# EAGLE board strobeeee (EAGLE 6.3), part 1 of 2
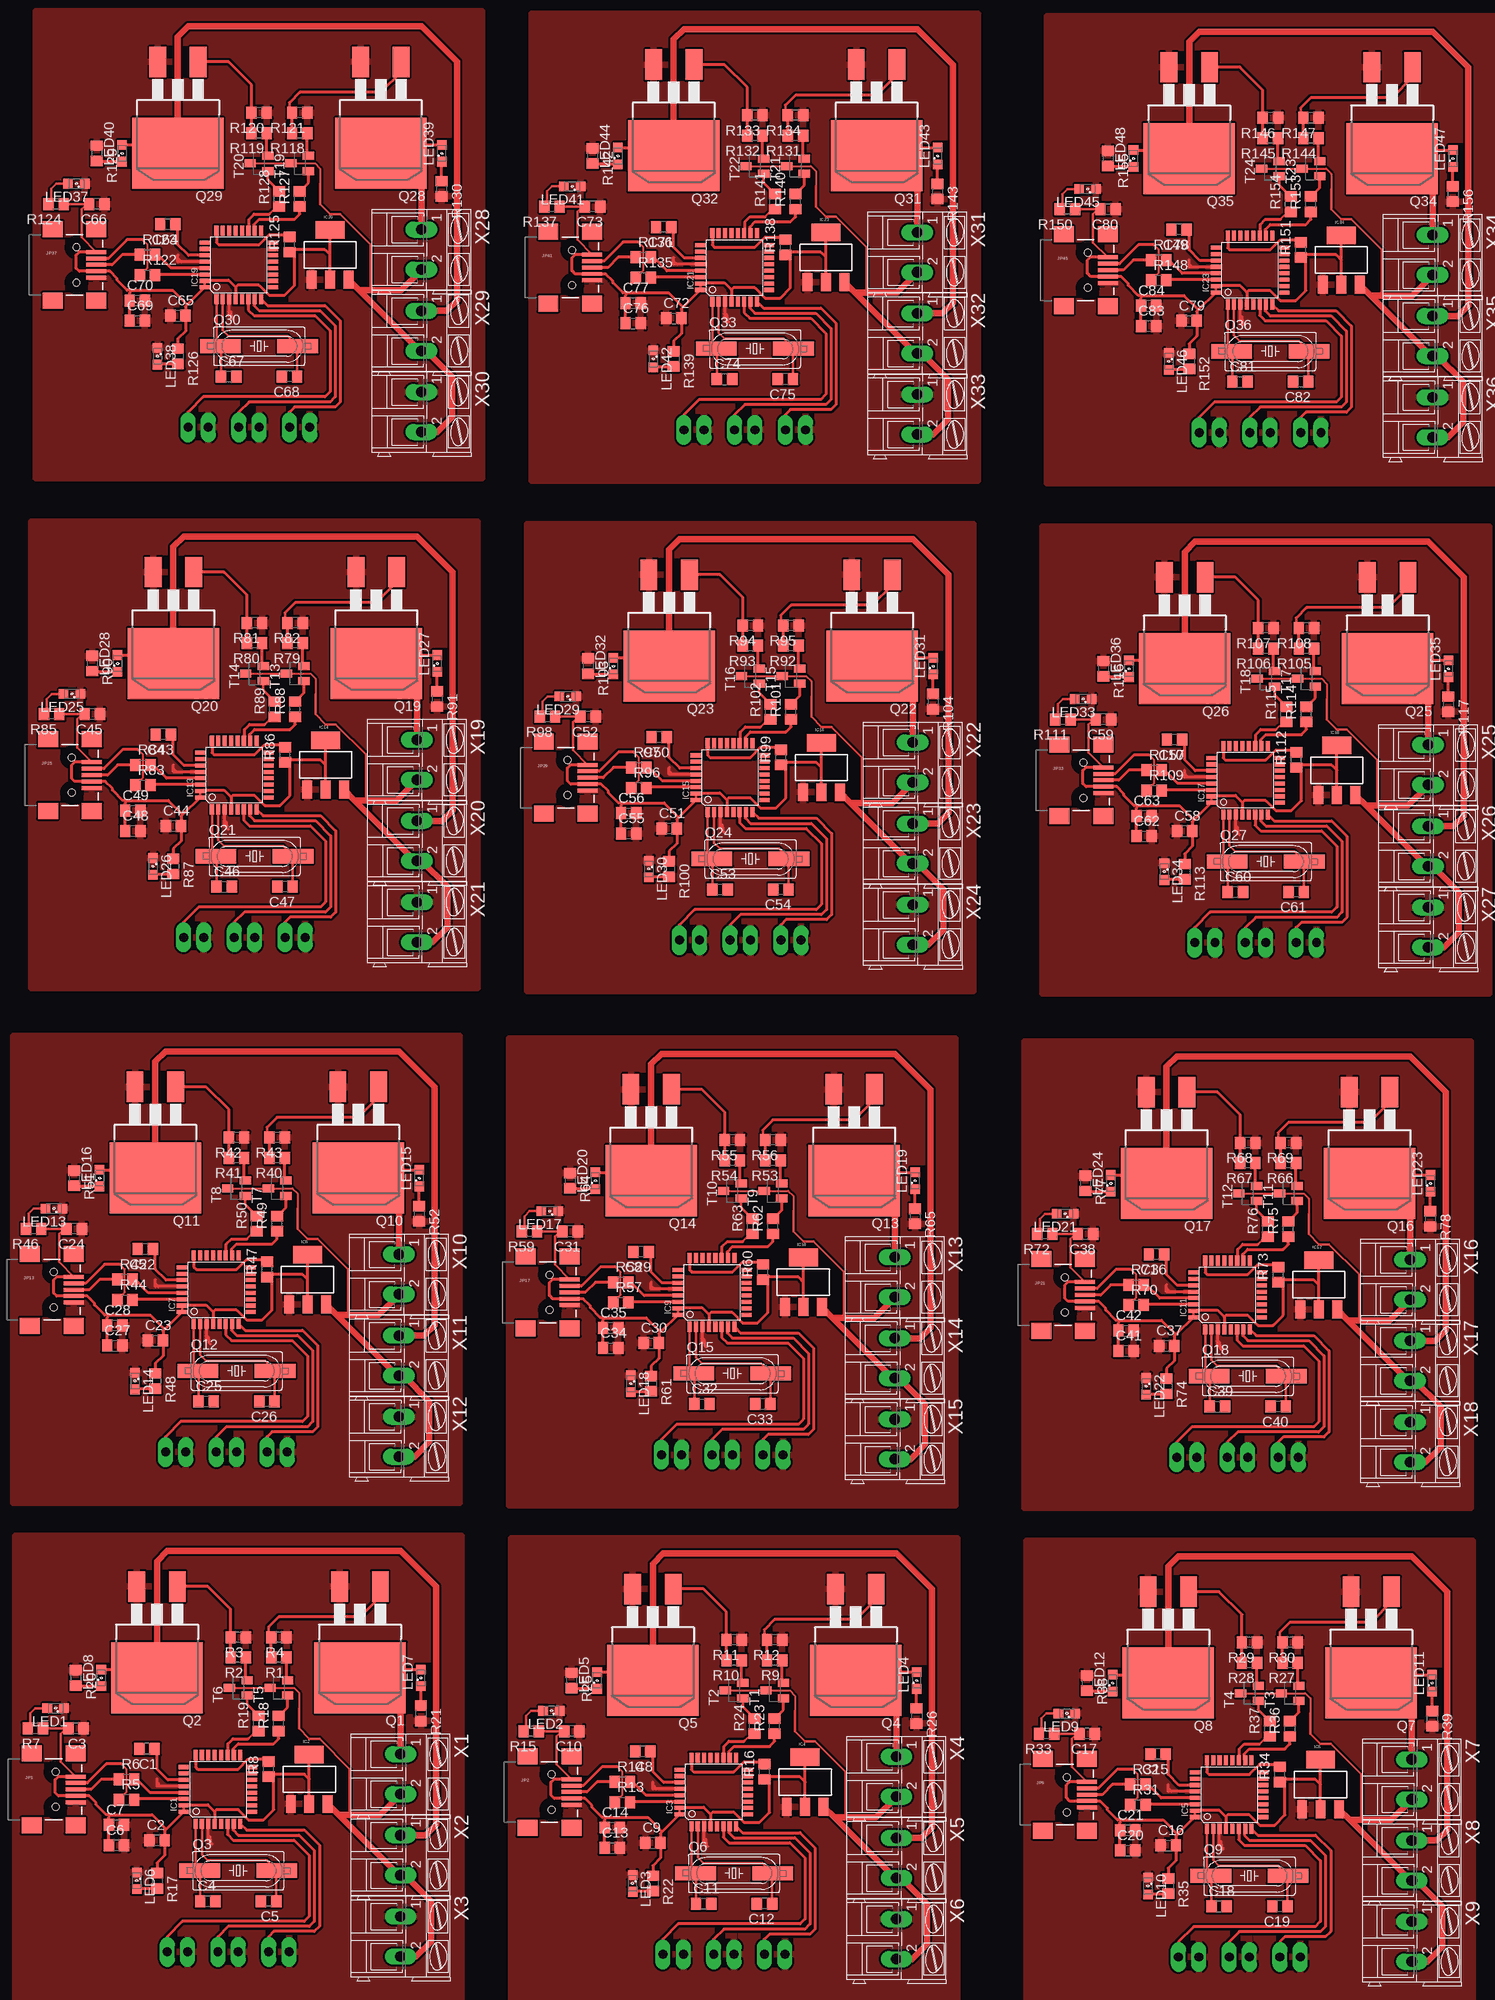
[diagram p0: board, top side]

No outline drawn. Coordinates in mm, seen from the top.
Copper layers (1*16): Top 0.035mm / dielectric 1.5mm / Bottom 0.035mm
Design rules "default": minimum track width 10mil, minimum drill 24mil, track to track 8mil, track to pad 8mil, pad to pad 8mil, via to via 8mil, smd to smd 8mil, copper to edge 40mil, drill to drill 8mil, minimum pad ring 10mil, minimum via ring 8mil, stop-mask expansion 4mil, vias tented up to drill 0mil, thermal gap 10mil

## Footprints (pad centres in the part's own frame; a part is rotated, then mirrored left to right if it is on the bottom)
C0805 = smd 1.3 x 1.5: 1 -0.95,0; 2 0.95,0
TQFP32-08 = smd 1.27 x 0.508: 1 -4.293,2.8; 2 -4.293,2; 3 -4.293,1.2; 4 -4.293,0.4; 5 -4.293,-0.4; 6 -4.293,-1.2; 7 -4.293,-2; 8 -4.293,-2.8; 17 4.293,-2.8; 18 4.293,-2; 19 4.293,-1.2; 20 4.293,-0.4; 21 4.293,0.4; 22 4.293,1.2; 23 4.293,2; 24 4.293,2.8 | smd 0.508 x 1.27: 9 -2.8,-4.293; 10 -2,-4.293; 11 -1.2,-4.293; 12 -0.4,-4.293; 13 0.4,-4.293; 14 1.2,-4.293; 15 2,-4.293; 16 2.8,-4.293; 25 2.8,4.293; 26 2,4.293; 27 1.2,4.293; 28 0.4,4.293; 29 -0.4,4.293; 30 -1.2,4.293; 31 -2,4.293; 32 -2.8,4.293
SOT223 = smd 1.219 x 2.235: 1 -2.311,-3.099; 2 0,-3.099; 3 2.311,-3.099 | smd 3.6 x 2.2: 4 0,3.099
USB-MINIB = smd 2.5 x 0.5: D+ 2.5,0; D- 2.5,0.8; GND 2.5,-1.6; ID 2.5,-0.8; VBUS 2.5,1.6 | smd 2.5 x 2: MTN1 -3,4.5; MTN2 2.5,4.5; MTN3 -3,-4.5; MTN4 2.5,-4.5 | hole 0.9: 0,2.2; 0,-2.2
1X02_LONGPADS = drill 1.118 pad 1.88 long: 1 0,0; 2 2.54,0
SML0805 = smd 1.2 x 1.2: A 1.05,0; C -1.05,0
D2PACK = smd 2.083 x 3.81: 1 -2.54,-8.89; 3 2.54,-8.89 | smd 11.43 x 8.89: 2 0,2.54
SM49 = smd 5.08 x 1.778: 1 -4.826,0; 2 4.826,0
R0805 = smd 1.3 x 1.5: 1 -0.95,0; 2 0.95,0
SOT23 = smd 1 x 1.4: 1 -0.95,-1.1; 2 0.95,-1.1; 3 0,1.1
AK300/2 = drill 1.321 long: 1 -2.515,0; 2 2.489,0

## Placement (x,y rotation side)
C1  1uF  [C0805]  17.78,60.96 180 top
C2  100N  [C0805]  19.05,49.53 0 top
C3  100N  [C0805]  8.89,63.5 180 top
C4  22Pf  [C0805]  25.4,41.91 0 top
C5  22Pf  [C0805]  33.02,41.91 180 top
C6  100N  [C0805]  13.97,48.9 0 top
C7  100N  [C0805]  13.97,51.44 0 top
C8  1uF  [C0805]  79.84,60.63 180 top
C9  100N  [C0805]  81.11,49.2 0 top
C10  100N  [C0805]  70.95,63.17 180 top
C11  22Pf  [C0805]  87.46,41.58 0 top
C12  22Pf  [C0805]  95.08,41.58 180 top
C13  100N  [C0805]  76.03,48.57 0 top
C14  100N  [C0805]  76.03,51.11 0 top
C15  1uF  [C0805]  144.35,60.31 180 top
C16  100N  [C0805]  145.62,48.88 0 top
C17  100N  [C0805]  135.46,62.85 180 top
C18  22Pf  [C0805]  151.97,41.26 0 top
C19  22Pf  [C0805]  159.59,41.26 180 top
C20  100N  [C0805]  140.54,48.24 0 top
C21  100N  [C0805]  140.54,50.78 0 top
C22  1uF  [C0805]  17.57,123.5 180 top
C23  100N  [C0805]  18.84,112.07 0 top
C24  100N  [C0805]  8.68,126.04 180 top
C25  22Pf  [C0805]  25.19,104.45 0 top
C26  22Pf  [C0805]  32.81,104.45 180 top
C27  100N  [C0805]  13.76,111.44 0 top
C28  100N  [C0805]  13.76,113.98 0 top
C29  1uF  [C0805]  79.63,123.17 180 top
C30  100N  [C0805]  80.9,111.74 0 top
C31  100N  [C0805]  70.74,125.71 180 top
C32  22Pf  [C0805]  87.25,104.12 0 top
C33  22Pf  [C0805]  94.87,104.12 180 top
C34  100N  [C0805]  75.82,111.11 0 top
C35  100N  [C0805]  75.82,113.65 0 top
C36  1uF  [C0805]  144.14,122.85 180 top
C37  100N  [C0805]  145.41,111.42 0 top
C38  100N  [C0805]  135.25,125.39 180 top
C39  22Pf  [C0805]  151.76,103.8 0 top
C40  22Pf  [C0805]  159.38,103.8 180 top
C41  100N  [C0805]  140.33,110.78 0 top
C42  100N  [C0805]  140.33,113.32 0 top
C43  1uF  [C0805]  19.83,187.92 180 top
C44  100N  [C0805]  21.1,176.49 0 top
C45  100N  [C0805]  10.94,190.46 180 top
C46  22Pf  [C0805]  27.45,168.87 0 top
C47  22Pf  [C0805]  35.07,168.87 180 top
C48  100N  [C0805]  16.02,175.85 0 top
C49  100N  [C0805]  16.02,178.39 0 top
C50  1uF  [C0805]  81.89,187.59 180 top
C51  100N  [C0805]  83.16,176.16 0 top
C52  100N  [C0805]  73,190.13 180 top
C53  22Pf  [C0805]  89.51,168.54 0 top
C54  22Pf  [C0805]  97.13,168.54 180 top
C55  100N  [C0805]  78.08,175.52 0 top
C56  100N  [C0805]  78.08,178.06 0 top
C57  1uF  [C0805]  146.4,187.26 180 top
C58  100N  [C0805]  147.67,175.83 0 top
C59  100N  [C0805]  137.51,189.8 180 top
C60  22Pf  [C0805]  154.02,168.21 0 top
C61  22Pf  [C0805]  161.64,168.21 180 top
C62  100N  [C0805]  142.59,175.2 0 top
C63  100N  [C0805]  142.59,177.74 0 top
C64  1uF  [C0805]  20.39,251.76 180 top
C65  100N  [C0805]  21.66,240.33 0 top
C66  100N  [C0805]  11.5,254.3 180 top
C67  22Pf  [C0805]  28.01,232.71 0 top
C68  22Pf  [C0805]  35.63,232.71 180 top
C69  100N  [C0805]  16.58,239.7 0 top
C70  100N  [C0805]  16.58,242.24 0 top
C71  1uF  [C0805]  82.45,251.44 180 top
C72  100N  [C0805]  83.72,240.01 0 top
C73  100N  [C0805]  73.56,253.98 180 top
C74  22Pf  [C0805]  90.07,232.39 0 top
C75  22Pf  [C0805]  97.69,232.39 180 top
C76  100N  [C0805]  78.64,239.37 0 top
C77  100N  [C0805]  78.64,241.91 0 top
C78  1uF  [C0805]  146.97,251.11 180 top
C79  100N  [C0805]  148.24,239.68 0 top
C80  100N  [C0805]  138.08,253.65 180 top
C81  22Pf  [C0805]  154.59,232.06 0 top
C82  22Pf  [C0805]  162.21,232.06 180 top
C83  100N  [C0805]  143.16,239.05 0 top
C84  100N  [C0805]  143.16,241.59 0 top
IC1  AT90USB162A  [TQFP32-08]  26.67,55.88 90 top
IC2  [SOT223]  38.1,57.15 0 top
IC3  AT90USB162A  [TQFP32-08]  88.73,55.55 90 top
IC4  [SOT223]  100.16,56.82 0 top
IC5  AT90USB162A  [TQFP32-08]  153.24,55.23 90 top
IC6  [SOT223]  164.67,56.5 0 top
IC7  AT90USB162A  [TQFP32-08]  26.46,118.42 90 top
IC8  [SOT223]  37.89,119.69 0 top
IC9  AT90USB162A  [TQFP32-08]  88.52,118.09 90 top
IC10  [SOT223]  99.95,119.36 0 top
IC11  AT90USB162A  [TQFP32-08]  153.03,117.77 90 top
IC12  [SOT223]  164.46,119.04 0 top
IC13  AT90USB162A  [TQFP32-08]  28.72,182.84 90 top
IC14  [SOT223]  40.15,184.11 0 top
IC15  AT90USB162A  [TQFP32-08]  90.78,182.51 90 top
IC16  [SOT223]  102.21,183.78 0 top
IC17  AT90USB162A  [TQFP32-08]  155.29,182.18 90 top
IC18  [SOT223]  166.72,183.45 0 top
IC19  AT90USB162A  [TQFP32-08]  29.28,246.68 90 top
IC20  [SOT223]  40.71,247.95 0 top
IC21  AT90USB162A  [TQFP32-08]  91.34,246.36 90 top
IC22  [SOT223]  102.77,247.63 0 top
IC23  AT90USB162A  [TQFP32-08]  155.86,246.03 90 top
IC24  [SOT223]  167.29,247.3 0 top
JP1  USBSMD  [USB-MINIB]  6.35,55.88 0 top
JP2  USBSMD  [USB-MINIB]  68.41,55.55 0 top
JP3  [1X02_LONGPADS]  82.38,35.23 0 top
JP4  [1X02_LONGPADS]  20.32,35.56 0 top
JP5  [1X02_LONGPADS]  26.67,35.56 0 top
JP6  [1X02_LONGPADS]  88.73,35.23 0 top
JP7  [1X02_LONGPADS]  33.02,35.56 0 top
JP8  [1X02_LONGPADS]  95.08,35.23 0 top
JP9  USBSMD  [USB-MINIB]  132.92,55.23 0 top
JP10  [1X02_LONGPADS]  146.89,34.91 0 top
JP11  [1X02_LONGPADS]  153.24,34.91 0 top
JP12  [1X02_LONGPADS]  159.59,34.91 0 top
JP13  USBSMD  [USB-MINIB]  6.14,118.42 0 top
JP14  [1X02_LONGPADS]  20.11,98.1 0 top
JP15  [1X02_LONGPADS]  26.46,98.1 0 top
JP16  [1X02_LONGPADS]  32.81,98.1 0 top
JP17  USBSMD  [USB-MINIB]  68.2,118.09 0 top
JP18  [1X02_LONGPADS]  82.17,97.77 0 top
JP19  [1X02_LONGPADS]  88.52,97.77 0 top
JP20  [1X02_LONGPADS]  94.87,97.77 0 top
JP21  USBSMD  [USB-MINIB]  132.71,117.77 0 top
JP22  [1X02_LONGPADS]  146.68,97.45 0 top
JP23  [1X02_LONGPADS]  153.03,97.45 0 top
JP24  [1X02_LONGPADS]  159.38,97.45 0 top
JP25  USBSMD  [USB-MINIB]  8.4,182.84 0 top
JP26  [1X02_LONGPADS]  22.37,162.52 0 top
JP27  [1X02_LONGPADS]  28.72,162.52 0 top
JP28  [1X02_LONGPADS]  35.07,162.52 0 top
JP29  USBSMD  [USB-MINIB]  70.46,182.51 0 top
JP30  [1X02_LONGPADS]  84.43,162.19 0 top
JP31  [1X02_LONGPADS]  90.78,162.19 0 top
JP32  [1X02_LONGPADS]  97.13,162.19 0 top
JP33  USBSMD  [USB-MINIB]  134.97,182.18 0 top
JP34  [1X02_LONGPADS]  148.94,161.86 0 top
JP35  [1X02_LONGPADS]  155.29,161.86 0 top
JP36  [1X02_LONGPADS]  161.64,161.86 0 top
JP37  USBSMD  [USB-MINIB]  8.96,246.68 0 top
JP38  [1X02_LONGPADS]  22.93,226.36 0 top
JP39  [1X02_LONGPADS]  29.28,226.36 0 top
JP40  [1X02_LONGPADS]  35.63,226.36 0 top
JP41  USBSMD  [USB-MINIB]  71.02,246.36 0 top
JP42  [1X02_LONGPADS]  84.99,226.04 0 top
JP43  [1X02_LONGPADS]  91.34,226.04 0 top
JP44  [1X02_LONGPADS]  97.69,226.04 0 top
JP45  USBSMD  [USB-MINIB]  135.54,246.03 0 top
JP46  [1X02_LONGPADS]  149.51,225.71 0 top
JP47  [1X02_LONGPADS]  155.86,225.71 0 top
JP48  [1X02_LONGPADS]  162.21,225.71 0 top
LED1  [SML0805]  6.35,66.04 180 top
LED2  [SML0805]  68.41,65.71 180 top
LED3  [SML0805]  78.57,44.12 270 top
LED4  [SML0805]  114.13,69.52 90 top
LED5  [SML0805]  74.13,69.52 90 top
LED6  [SML0805]  16.51,44.45 270 top
LED7  [SML0805]  52.07,69.85 90 top
LED8  [SML0805]  12.06,69.85 90 top
LED9  [SML0805]  132.92,65.39 180 top
LED10  [SML0805]  143.08,43.8 270 top
LED11  [SML0805]  178.64,69.2 90 top
LED12  [SML0805]  138.64,69.2 90 top
LED13  [SML0805]  6.14,128.58 180 top
LED14  [SML0805]  16.3,106.99 270 top
LED15  [SML0805]  51.86,132.39 90 top
LED16  [SML0805]  11.86,132.39 90 top
LED17  [SML0805]  68.2,128.25 180 top
LED18  [SML0805]  78.36,106.66 270 top
LED19  [SML0805]  113.92,132.06 90 top
LED20  [SML0805]  73.92,132.06 90 top
LED21  [SML0805]  132.71,127.93 180 top
LED22  [SML0805]  142.87,106.34 270 top
LED23  [SML0805]  178.43,131.74 90 top
LED24  [SML0805]  138.43,131.74 90 top
LED25  [SML0805]  8.4,193 180 top
LED26  [SML0805]  18.56,171.41 270 top
LED27  [SML0805]  54.12,196.81 90 top
LED28  [SML0805]  14.11,196.81 90 top
LED29  [SML0805]  70.46,192.67 180 top
LED30  [SML0805]  80.62,171.08 270 top
LED31  [SML0805]  116.18,196.48 90 top
LED32  [SML0805]  76.17,196.48 90 top
LED33  [SML0805]  134.97,192.34 180 top
LED34  [SML0805]  145.13,170.75 270 top
LED35  [SML0805]  180.69,196.15 90 top
LED36  [SML0805]  140.69,196.15 90 top
LED37  [SML0805]  8.96,256.84 180 top
LED38  [SML0805]  19.12,235.25 270 top
LED39  [SML0805]  54.68,260.65 90 top
LED40  [SML0805]  14.68,260.65 90 top
LED41  [SML0805]  71.02,256.52 180 top
LED42  [SML0805]  81.18,234.93 270 top
LED43  [SML0805]  116.74,260.33 90 top
LED44  [SML0805]  76.74,260.33 90 top
LED45  [SML0805]  135.54,256.19 180 top
LED46  [SML0805]  145.7,234.6 270 top
LED47  [SML0805]  181.26,260 90 top
LED48  [SML0805]  141.25,260 90 top
Q1  IRF3704S  [D2PACK]  44.45,72.39 180 top
Q2  IRF3704S  [D2PACK]  19.05,72.39 180 top
Q3  [SM49]  29.21,45.72 0 top
Q4  IRF3704S  [D2PACK]  106.51,72.06 180 top
Q5  IRF3704S  [D2PACK]  81.11,72.06 180 top
Q6  [SM49]  91.27,45.39 0 top
Q7  IRF3704S  [D2PACK]  171.02,71.74 180 top
Q8  IRF3704S  [D2PACK]  145.62,71.74 180 top
Q9  [SM49]  155.78,45.07 0 top
Q10  IRF3704S  [D2PACK]  44.24,134.93 180 top
Q11  IRF3704S  [D2PACK]  18.84,134.93 180 top
Q12  [SM49]  29,108.26 0 top
Q13  IRF3704S  [D2PACK]  106.3,134.6 180 top
Q14  IRF3704S  [D2PACK]  80.9,134.6 180 top
Q15  [SM49]  91.06,107.93 0 top
Q16  IRF3704S  [D2PACK]  170.81,134.28 180 top
Q17  IRF3704S  [D2PACK]  145.41,134.28 180 top
Q18  [SM49]  155.57,107.61 0 top
Q19  IRF3704S  [D2PACK]  46.5,199.35 180 top
Q20  IRF3704S  [D2PACK]  21.1,199.35 180 top
Q21  [SM49]  31.26,172.68 0 top
Q22  IRF3704S  [D2PACK]  108.56,199.02 180 top
Q23  IRF3704S  [D2PACK]  83.16,199.02 180 top
Q24  [SM49]  93.32,172.35 0 top
Q25  IRF3704S  [D2PACK]  173.07,198.69 180 top
Q26  IRF3704S  [D2PACK]  147.67,198.69 180 top
Q27  [SM49]  157.83,172.02 0 top
Q28  IRF3704S  [D2PACK]  47.06,263.19 180 top
Q29  IRF3704S  [D2PACK]  21.66,263.19 180 top
Q30  [SM49]  31.82,236.52 0 top
Q31  IRF3704S  [D2PACK]  109.12,262.87 180 top
Q32  IRF3704S  [D2PACK]  83.72,262.87 180 top
Q33  [SM49]  93.88,236.2 0 top
Q34  IRF3704S  [D2PACK]  173.64,262.54 180 top
Q35  IRF3704S  [D2PACK]  148.24,262.54 180 top
Q36  [SM49]  158.4,235.87 0 top
R1  [R0805]  34.29,72.39 180 top
R2  [R0805]  29.21,72.39 180 top
R3  [R0805]  29.21,74.93 180 top
R4  [R0805]  34.29,74.93 180 top
R5  22  [R0805]  15.24,54.61 0 top
R6  22  [R0805]  15.24,57.15 0 top
R7  340  [R0805]  3.81,63.5 180 top
R8  10K  [R0805]  33.02,58.42 90 top
R9  [R0805]  96.35,72.06 180 top
R10  [R0805]  91.27,72.06 180 top
R11  [R0805]  91.27,74.6 180 top
R12  [R0805]  96.35,74.6 180 top
R13  22  [R0805]  77.3,54.28 0 top
R14  22  [R0805]  77.3,56.82 0 top
R15  340  [R0805]  65.87,63.17 180 top
R16  10K  [R0805]  95.08,58.09 90 top
R17  340  [R0805]  19.05,44.45 270 top
R18  [R0805]  34.29,64.14 90 top
R19  [R0805]  31.75,64.14 90 top
R20  [R0805]  8.89,69.85 270 top
R21  [R0805]  52.07,65.41 270 top
R22  340  [R0805]  81.11,44.12 270 top
R23  [R0805]  96.35,63.81 90 top
R24  [R0805]  93.81,63.81 90 top
R25  [R0805]  70.95,69.52 270 top
R26  [R0805]  114.13,65.08 270 top
R27  [R0805]  160.86,71.74 180 top
R28  [R0805]  155.78,71.74 180 top
R29  [R0805]  155.78,74.28 180 top
R30  [R0805]  160.86,74.28 180 top
R31  22  [R0805]  141.81,53.96 0 top
R32  22  [R0805]  141.81,56.5 0 top
R33  340  [R0805]  130.38,62.85 180 top
R34  10K  [R0805]  159.59,57.77 90 top
R35  340  [R0805]  145.62,43.8 270 top
R36  [R0805]  160.86,63.48 90 top
R37  [R0805]  158.32,63.48 90 top
R38  [R0805]  135.46,69.2 270 top
R39  [R0805]  178.64,64.75 270 top
R40  [R0805]  34.08,134.93 180 top
R41  [R0805]  29,134.93 180 top
R42  [R0805]  29,137.47 180 top
R43  [R0805]  34.08,137.47 180 top
R44  22  [R0805]  15.03,117.15 0 top
R45  22  [R0805]  15.03,119.69 0 top
R46  340  [R0805]  3.6,126.04 180 top
R47  10K  [R0805]  32.81,120.96 90 top
R48  340  [R0805]  18.84,106.99 270 top
R49  [R0805]  34.08,126.68 90 top
R50  [R0805]  31.54,126.68 90 top
R51  [R0805]  8.68,132.39 270 top
R52  [R0805]  51.86,127.95 270 top
R53  [R0805]  96.14,134.6 180 top
R54  [R0805]  91.06,134.6 180 top
R55  [R0805]  91.06,137.14 180 top
R56  [R0805]  96.14,137.14 180 top
R57  22  [R0805]  77.09,116.82 0 top
R58  22  [R0805]  77.09,119.36 0 top
R59  340  [R0805]  65.66,125.71 180 top
R60  10K  [R0805]  94.87,120.63 90 top
R61  340  [R0805]  80.9,106.66 270 top
R62  [R0805]  96.14,126.35 90 top
R63  [R0805]  93.6,126.35 90 top
R64  [R0805]  70.74,132.06 270 top
R65  [R0805]  113.92,127.62 270 top
R66  [R0805]  160.65,134.28 180 top
R67  [R0805]  155.57,134.28 180 top
R68  [R0805]  155.57,136.82 180 top
R69  [R0805]  160.65,136.82 180 top
R70  22  [R0805]  141.6,116.5 0 top
R71  22  [R0805]  141.6,119.04 0 top
R72  340  [R0805]  130.17,125.39 180 top
R73  10K  [R0805]  159.38,120.31 90 top
R74  340  [R0805]  145.41,106.34 270 top
R75  [R0805]  160.65,126.02 90 top
R76  [R0805]  158.11,126.02 90 top
R77  [R0805]  135.25,131.74 270 top
R78  [R0805]  178.43,127.29 270 top
R79  [R0805]  36.34,199.35 180 top
R80  [R0805]  31.26,199.35 180 top
R81  [R0805]  31.26,201.89 180 top
R82  [R0805]  36.34,201.89 180 top
R83  22  [R0805]  17.29,181.57 0 top
R84  22  [R0805]  17.29,184.11 0 top
R85  340  [R0805]  5.86,190.46 180 top
R86  10K  [R0805]  35.07,185.38 90 top
R87  340  [R0805]  21.1,171.41 270 top
R88  [R0805]  36.34,191.09 90 top
R89  [R0805]  33.8,191.09 90 top
R90  [R0805]  10.94,196.81 270 top
R91  [R0805]  54.12,192.36 270 top
R92  [R0805]  98.4,199.02 180 top
R93  [R0805]  93.32,199.02 180 top
R94  [R0805]  93.32,201.56 180 top
R95  [R0805]  98.4,201.56 180 top
R96  22  [R0805]  79.35,181.24 0 top
R97  22  [R0805]  79.35,183.78 0 top
R98  340  [R0805]  67.92,190.13 180 top
R99  10K  [R0805]  97.13,185.05 90 top
R100  340  [R0805]  83.16,171.08 270 top
R101  [R0805]  98.4,190.76 90 top
R102  [R0805]  95.86,190.76 90 top
R103  [R0805]  73,196.48 270 top
R104  [R0805]  116.18,192.03 270 top
R105  [R0805]  162.91,198.69 180 top
R106  [R0805]  157.83,198.69 180 top
R107  [R0805]  157.83,201.23 180 top
R108  [R0805]  162.91,201.23 180 top
R109  22  [R0805]  143.86,180.91 0 top
R110  22  [R0805]  143.86,183.45 0 top
R111  340  [R0805]  132.43,189.8 180 top
R112  10K  [R0805]  161.64,184.72 90 top
R113  340  [R0805]  147.67,170.75 270 top
R114  [R0805]  162.91,190.44 90 top
R115  [R0805]  160.37,190.44 90 top
R116  [R0805]  137.51,196.15 270 top
R117  [R0805]  180.69,191.71 270 top
R118  [R0805]  36.9,263.19 180 top
R119  [R0805]  31.82,263.19 180 top
R120  [R0805]  31.82,265.73 180 top
R121  [R0805]  36.9,265.73 180 top
R122  22  [R0805]  17.85,245.41 0 top
R123  22  [R0805]  17.85,247.95 0 top
R124  340  [R0805]  6.42,254.3 180 top
R125  10K  [R0805]  35.63,249.22 90 top
R126  340  [R0805]  21.66,235.25 270 top
R127  [R0805]  36.9,254.94 90 top
R128  [R0805]  34.36,254.94 90 top
R129  [R0805]  11.5,260.65 270 top
R130  [R0805]  54.68,256.21 270 top
R131  [R0805]  98.96,262.87 180 top
R132  [R0805]  93.88,262.87 180 top
R133  [R0805]  93.88,265.41 180 top
R134  [R0805]  98.96,265.41 180 top
R135  22  [R0805]  79.91,245.09 0 top
R136  22  [R0805]  79.91,247.63 0 top
R137  340  [R0805]  68.48,253.98 180 top
R138  10K  [R0805]  97.69,248.9 90 top
R139  340  [R0805]  83.72,234.93 270 top
R140  [R0805]  98.96,254.61 90 top
R141  [R0805]  96.42,254.61 90 top
R142  [R0805]  73.56,260.33 270 top
R143  [R0805]  116.74,255.88 270 top
R144  [R0805]  163.48,262.54 180 top
R145  [R0805]  158.4,262.54 180 top
R146  [R0805]  158.4,265.08 180 top
R147  [R0805]  163.48,265.08 180 top
R148  22  [R0805]  144.43,244.76 0 top
R149  22  [R0805]  144.43,247.3 0 top
R150  340  [R0805]  133,253.65 180 top
R151  10K  [R0805]  162.21,248.57 90 top
R152  340  [R0805]  148.24,234.6 270 top
R153  [R0805]  163.48,254.29 90 top
R154  [R0805]  160.94,254.29 90 top
R155  [R0805]  138.08,260 270 top
R156  [R0805]  181.26,255.56 270 top
T1  BC849  [SOT23]  96.35,68.25 90 top
T2  BC849  [SOT23]  91.27,68.25 90 top
T3  BC849  [SOT23]  160.86,67.93 90 top
T4  BC849  [SOT23]  155.78,67.93 90 top
T5  BC849  [SOT23]  34.29,68.58 90 top
T6  BC849  [SOT23]  29.21,68.58 90 top
T7  BC849  [SOT23]  34.08,131.12 90 top
T8  BC849  [SOT23]  29,131.12 90 top
T9  BC849  [SOT23]  96.14,130.79 90 top
T10  BC849  [SOT23]  91.06,130.79 90 top
T11  BC849  [SOT23]  160.65,130.47 90 top
T12  BC849  [SOT23]  155.57,130.47 90 top
T13  BC849  [SOT23]  36.34,195.54 90 top
T14  BC849  [SOT23]  31.26,195.54 90 top
T15  BC849  [SOT23]  98.4,195.21 90 top
T16  BC849  [SOT23]  93.32,195.21 90 top
T17  BC849  [SOT23]  162.91,194.88 90 top
T18  BC849  [SOT23]  157.83,194.88 90 top
T19  BC849  [SOT23]  36.9,259.38 90 top
T20  BC849  [SOT23]  31.82,259.38 90 top
T21  BC849  [SOT23]  98.96,259.06 90 top
T22  BC849  [SOT23]  93.88,259.06 90 top
T23  BC849  [SOT23]  163.48,258.73 90 top
T24  BC849  [SOT23]  158.4,258.73 90 top
X1  [AK300/2]  49.53,57.78 270 top
X2  [AK300/2]  49.53,47.62 270 top
X3  [AK300/2]  49.53,37.47 270 top
X4  [AK300/2]  111.59,57.46 270 top
X5  [AK300/2]  111.59,47.3 270 top
X6  [AK300/2]  111.59,37.14 270 top
X7  [AK300/2]  176.1,57.13 270 top
X8  [AK300/2]  176.1,46.97 270 top
X9  [AK300/2]  176.1,36.81 270 top
X10  [AK300/2]  49.32,120.33 270 top
X11  [AK300/2]  49.32,110.17 270 top
X12  [AK300/2]  49.32,100.01 270 top
X13  [AK300/2]  111.38,120 270 top
X14  [AK300/2]  111.38,109.84 270 top
X15  [AK300/2]  111.38,99.68 270 top
X16  [AK300/2]  175.89,119.67 270 top
X17  [AK300/2]  175.89,109.51 270 top
X18  [AK300/2]  175.89,99.35 270 top
X19  [AK300/2]  51.58,184.74 270 top
X20  [AK300/2]  51.58,174.58 270 top
X21  [AK300/2]  51.58,164.42 270 top
X22  [AK300/2]  113.64,184.41 270 top
X23  [AK300/2]  113.64,174.25 270 top
X24  [AK300/2]  113.64,164.09 270 top
X25  [AK300/2]  178.15,184.09 270 top
X26  [AK300/2]  178.15,173.93 270 top
X27  [AK300/2]  178.15,163.77 270 top
X28  [AK300/2]  52.14,248.59 270 top
X29  [AK300/2]  52.14,238.43 270 top
X30  [AK300/2]  52.14,228.27 270 top
X31  [AK300/2]  114.2,248.26 270 top
X32  [AK300/2]  114.2,238.1 270 top
X33  [AK300/2]  114.2,227.94 270 top
X34  [AK300/2]  178.72,247.94 270 top
X35  [AK300/2]  178.72,237.78 270 top
X36  [AK300/2]  178.72,227.62 270 top

## Library data of the parts
C1-C84 R1-R156 = rcl
IC1 IC3 IC5 IC7 IC9 IC11 IC13 IC15 IC17 IC19 IC21 IC23 = adafruit
IC2 IC4 IC6 IC8 IC10 IC12 IC14 IC16 IC18 IC20 IC22 IC24 = SparkFun-PowerIC
JP1-JP48 = SparkFun-Connectors
LED1-LED48 = led
Q1 Q2 Q4 Q5 Q7 Q8 Q10 Q11 Q13 Q14 Q16 Q17 Q19 Q20 Q22 Q23 Q25 Q26 Q28 Q29 Q31 Q32 Q34 Q35 = transistor-power
Q3 Q6 Q9 Q12 Q15 Q18 Q21 Q24 Q27 Q30 Q33 Q36 = crystal; OC_FARNELL: unknown; OC_NEWARK: unknown
T1-T24 = transistor
X1-X36 = con-ptr500; OC_FARNELL: unknown; OC_NEWARK: unknown

## Nets
5V: C2.2 C3.2 C6.1 C7.1 IC1.4 IC1.31 IC1.32 IC2.2 IC2.4 JP1.VBUS R7.1 R8.1 R17.1
5V1: C9.2 C10.2 C13.1 C14.1 IC3.4 IC3.31 IC3.32 IC4.2 IC4.4 JP2.VBUS R15.1 R16.1 R22.1
5V2: C16.2 C17.2 C20.1 C21.1 IC5.4 IC5.31 IC5.32 IC6.2 IC6.4 JP9.VBUS R33.1 R34.1 R35.1
5V3: C23.2 C24.2 C27.1 C28.1 IC7.4 IC7.31 IC7.32 IC8.2 IC8.4 JP13.VBUS R46.1 R47.1 R48.1
5V4: C30.2 C31.2 C34.1 C35.1 IC9.4 IC9.31 IC9.32 IC10.2 IC10.4 JP17.VBUS R59.1 R60.1 R61.1
5V5: C37.2 C38.2 C41.1 C42.1 IC11.4 IC11.31 IC11.32 IC12.2 IC12.4 JP21.VBUS R72.1 R73.1 R74.1
5V6: C44.2 C45.2 C48.1 C49.1 IC13.4 IC13.31 IC13.32 IC14.2 IC14.4 JP25.VBUS R85.1 R86.1 R87.1
5V7: C51.2 C52.2 C55.1 C56.1 IC15.4 IC15.31 IC15.32 IC16.2 IC16.4 JP29.VBUS R98.1 R99.1 R100.1
5V8: C58.2 C59.2 C62.1 C63.1 IC17.4 IC17.31 IC17.32 IC18.2 IC18.4 JP33.VBUS R111.1 R112.1 R113.1
5V9: C65.2 C66.2 C69.1 C70.1 IC19.4 IC19.31 IC19.32 IC20.2 IC20.4 JP37.VBUS R124.1 R125.1 R126.1
5V10: C72.2 C73.2 C76.1 C77.1 IC21.4 IC21.31 IC21.32 IC22.2 IC22.4 JP41.VBUS R137.1 R138.1 R139.1
5V11: C79.2 C80.2 C83.1 C84.1 IC23.4 IC23.31 IC23.32 IC24.2 IC24.4 JP45.VBUS R150.1 R151.1 R152.1
12V: IC2.3 T5.3 T6.3 X1.2 X2.2 X3.2
12V1: IC4.3 T1.3 T2.3 X4.2 X5.2 X6.2
12V2: IC6.3 T3.3 T4.3 X7.2 X8.2 X9.2
12V3: IC8.3 T7.3 T8.3 X10.2 X11.2 X12.2
12V4: IC10.3 T9.3 T10.3 X13.2 X14.2 X15.2
12V5: IC12.3 T11.3 T12.3 X16.2 X17.2 X18.2
12V6: IC14.3 T13.3 T14.3 X19.2 X20.2 X21.2
12V7: IC16.3 T15.3 T16.3 X22.2 X23.2 X24.2
12V8: IC18.3 T17.3 T18.3 X25.2 X26.2 X27.2
12V9: IC20.3 T19.3 T20.3 X28.2 X29.2 X30.2
12V10: IC22.3 T21.3 T22.3 X31.2 X32.2 X33.2
12V11: IC24.3 T23.3 T24.3 X34.2 X35.2 X36.2
B1: IC1.6 JP4.1
B2: IC1.7 JP5.1
B3: IC1.8 JP7.1
B4: IC3.6 JP3.1
B5: IC3.7 JP6.1
B6: IC3.8 JP8.1
B7: IC5.6 JP10.1
B8: IC5.7 JP11.1
B9: IC5.8 JP12.1
B10: IC7.6 JP14.1
B11: IC7.7 JP15.1
B12: IC7.8 JP16.1
B13: IC9.6 JP18.1
B14: IC9.7 JP19.1
B15: IC9.8 JP20.1
B16: IC11.6 JP22.1
B17: IC11.7 JP23.1
B18: IC11.8 JP24.1
B19: IC13.6 JP26.1
B20: IC13.7 JP27.1
B21: IC13.8 JP28.1
B22: IC15.6 JP30.1
B23: IC15.7 JP31.1
B24: IC15.8 JP32.1
B25: IC17.6 JP34.1
B26: IC17.7 JP35.1
B27: IC17.8 JP36.1
B28: IC19.6 JP38.1
B29: IC19.7 JP39.1
B30: IC19.8 JP40.1
B31: IC21.6 JP42.1
B32: IC21.7 JP43.1
B33: IC21.8 JP44.1
B34: IC23.6 JP46.1
B35: IC23.7 JP47.1
B36: IC23.8 JP48.1
CH1: IC1.18 R18.1
CH2: IC1.19 R19.1
CH3: IC3.18 R23.1
CH4: IC3.19 R24.1
CH5: IC5.18 R36.1
CH6: IC5.19 R37.1
CH7: IC7.18 R49.1
CH8: IC7.19 R50.1
CH9: IC9.18 R62.1
CH10: IC9.19 R63.1
CH11: IC11.18 R75.1
CH12: IC11.19 R76.1
CH13: IC13.18 R88.1
CH14: IC13.19 R89.1
CH15: IC15.18 R101.1
CH16: IC15.19 R102.1
CH17: IC17.18 R114.1
CH18: IC17.19 R115.1
CH19: IC19.18 R127.1
CH20: IC19.19 R128.1
CH21: IC21.18 R140.1
CH22: IC21.19 R141.1
CH23: IC23.18 R153.1
CH24: IC23.19 R154.1
GND: C2.1 C3.1 C6.2 C7.2 IC1.3 IC1.28 IC2.1 JP1.GND JP4.2 JP5.2 JP7.2 LED1.C LED6.C Q1.3 Q2.3 R3.1 R4.1 R20.1 R21.2 X3.1
GND1: C9.1 C10.1 C13.2 C14.2 IC3.3 IC3.28 IC4.1 JP2.GND JP3.2 JP6.2 JP8.2 LED2.C LED3.C Q4.3 Q5.3 R11.1 R12.1 R25.1 R26.2 X6.1
GND2: C16.1 C17.1 C20.2 C21.2 IC5.3 IC5.28 IC6.1 JP9.GND JP10.2 JP11.2 JP12.2 LED9.C LED10.C Q7.3 Q8.3 R29.1 R30.1 R38.1 R39.2 X9.1
GND3: C23.1 C24.1 C27.2 C28.2 IC7.3 IC7.28 IC8.1 JP13.GND JP14.2 JP15.2 JP16.2 LED13.C LED14.C Q10.3 Q11.3 R42.1 R43.1 R51.1 R52.2 X12.1
GND4: C30.1 C31.1 C34.2 C35.2 IC9.3 IC9.28 IC10.1 JP17.GND JP18.2 JP19.2 JP20.2 LED17.C LED18.C Q13.3 Q14.3 R55.1 R56.1 R64.1 R65.2 X15.1
GND5: C37.1 C38.1 C41.2 C42.2 IC11.3 IC11.28 IC12.1 JP21.GND JP22.2 JP23.2 JP24.2 LED21.C LED22.C Q16.3 Q17.3 R68.1 R69.1 R77.1 R78.2 X18.1
GND6: C44.1 C45.1 C48.2 C49.2 IC13.3 IC13.28 IC14.1 JP25.GND JP26.2 JP27.2 JP28.2 LED25.C LED26.C Q19.3 Q20.3 R81.1 R82.1 R90.1 R91.2 X21.1
GND7: C51.1 C52.1 C55.2 C56.2 IC15.3 IC15.28 IC16.1 JP29.GND JP30.2 JP31.2 JP32.2 LED29.C LED30.C Q22.3 Q23.3 R94.1 R95.1 R103.1 R104.2 X24.1
GND8: C58.1 C59.1 C62.2 C63.2 IC17.3 IC17.28 IC18.1 JP33.GND JP34.2 JP35.2 JP36.2 LED33.C LED34.C Q25.3 Q26.3 R107.1 R108.1 R116.1 R117.2 X27.1
GND9: C65.1 C66.1 C69.2 C70.2 IC19.3 IC19.28 IC20.1 JP37.GND JP38.2 JP39.2 JP40.2 LED37.C LED38.C Q28.3 Q29.3 R120.1 R121.1 R129.1 R130.2 X30.1
GND10: C72.1 C73.1 C76.2 C77.2 IC21.3 IC21.28 IC22.1 JP41.GND JP42.2 JP43.2 JP44.2 LED41.C LED42.C Q31.3 Q32.3 R133.1 R134.1 R142.1 R143.2 X33.1
GND11: C79.1 C80.1 C83.2 C84.2 IC23.3 IC23.28 IC24.1 JP45.GND JP46.2 JP47.2 JP48.2 LED45.C LED46.C Q34.3 Q35.3 R146.1 R147.1 R155.1 R156.2 X36.1
N$1: Q1.1 R1.2 R4.2
N$2: Q2.1 R2.2 R3.2
N$3: LED7.A Q1.2 X1.1
N$4: LED8.A Q2.2 X2.1
N$5: C1.1 IC1.27
N$6: JP1.D+ R6.1
N$7: JP1.D- R5.1
N$8: IC1.30 R5.2
N$9: IC1.29 R6.2
N$10: LED1.A R7.2
N$11: Q4.1 R9.2 R12.2
N$12: C5.1 IC1.2 Q3.2
N$13: C4.1 IC1.1 Q3.1
N$14: IC1.24 R8.2
N$15: Q5.1 R10.2 R11.2
N$16: LED4.A Q4.2 X4.1
N$17: LED5.A Q5.2 X5.1
N$18: C8.1 IC3.27
N$19: JP2.D+ R14.1
N$20: JP2.D- R13.1
N$21: IC3.30 R13.2
N$22: IC3.29 R14.2
N$23: LED2.A R15.2
N$24: C12.1 IC3.2 Q6.2
N$25: C11.1 IC3.1 Q6.1
N$26: IC3.24 R16.2
N$27: LED6.A R17.2
N$28: R1.1 T5.2
N$29: R2.1 T6.2
N$30: R18.2 T5.1
N$31: R19.2 T6.1
N$32: LED8.C R20.2
N$33: LED7.C R21.1
N$34: LED3.A R22.2
N$35: R9.1 T1.2
N$36: R10.1 T2.2
N$37: R23.2 T1.1
N$38: R24.2 T2.1
N$39: LED5.C R25.2
N$40: LED4.C R26.1
N$41: Q7.1 R27.2 R30.2
N$42: Q8.1 R28.2 R29.2
N$43: LED11.A Q7.2 X7.1
N$44: LED12.A Q8.2 X8.1
N$45: C15.1 IC5.27
N$46: JP9.D+ R32.1
N$47: JP9.D- R31.1
N$48: IC5.30 R31.2
N$49: IC5.29 R32.2
N$50: LED9.A R33.2
N$51: C19.1 IC5.2 Q9.2
N$52: C18.1 IC5.1 Q9.1
N$53: IC5.24 R34.2
N$54: LED10.A R35.2
N$55: R27.1 T3.2
N$56: R28.1 T4.2
N$57: R36.2 T3.1
N$58: R37.2 T4.1
N$59: LED12.C R38.2
N$60: LED11.C R39.1
N$61: Q10.1 R40.2 R43.2
N$62: Q11.1 R41.2 R42.2
N$63: LED15.A Q10.2 X10.1
N$64: LED16.A Q11.2 X11.1
N$65: C22.1 IC7.27
N$66: JP13.D+ R45.1
N$67: JP13.D- R44.1
N$68: IC7.30 R44.2
N$69: IC7.29 R45.2
N$70: LED13.A R46.2
N$71: C26.1 IC7.2 Q12.2
N$72: C25.1 IC7.1 Q12.1
N$73: IC7.24 R47.2
N$74: LED14.A R48.2
N$75: R40.1 T7.2
N$76: R41.1 T8.2
N$77: R49.2 T7.1
N$78: R50.2 T8.1
N$79: LED16.C R51.2
N$80: LED15.C R52.1
N$81: Q13.1 R53.2 R56.2
N$82: Q14.1 R54.2 R55.2
N$83: LED19.A Q13.2 X13.1
N$84: LED20.A Q14.2 X14.1
N$85: C29.1 IC9.27
N$86: JP17.D+ R58.1
N$87: JP17.D- R57.1
N$88: IC9.30 R57.2
N$89: IC9.29 R58.2
N$90: LED17.A R59.2
N$91: C33.1 IC9.2 Q15.2
N$92: C32.1 IC9.1 Q15.1
N$93: IC9.24 R60.2
N$94: LED18.A R61.2
N$95: R53.1 T9.2
N$96: R54.1 T10.2
N$97: R62.2 T9.1
N$98: R63.2 T10.1
N$99: LED20.C R64.2
N$100: LED19.C R65.1
N$101: Q16.1 R66.2 R69.2
N$102: Q17.1 R67.2 R68.2
N$103: LED23.A Q16.2 X16.1
N$104: LED24.A Q17.2 X17.1
N$105: C36.1 IC11.27
N$106: JP21.D+ R71.1
N$107: JP21.D- R70.1
N$108: IC11.30 R70.2
N$109: IC11.29 R71.2
N$110: LED21.A R72.2
N$111: C40.1 IC11.2 Q18.2
N$112: C39.1 IC11.1 Q18.1
N$113: IC11.24 R73.2
N$114: LED22.A R74.2
N$115: R66.1 T11.2
N$116: R67.1 T12.2
N$117: R75.2 T11.1
N$118: R76.2 T12.1
N$119: LED24.C R77.2
N$120: LED23.C R78.1
N$121: Q19.1 R79.2 R82.2
N$122: Q20.1 R80.2 R81.2
N$123: LED27.A Q19.2 X19.1
N$124: LED28.A Q20.2 X20.1
N$125: C43.1 IC13.27
N$126: JP25.D+ R84.1
N$127: JP25.D- R83.1
N$128: IC13.30 R83.2
N$129: IC13.29 R84.2
N$130: LED25.A R85.2
N$131: C47.1 IC13.2 Q21.2
N$132: C46.1 IC13.1 Q21.1
N$133: IC13.24 R86.2
N$134: LED26.A R87.2
N$135: R79.1 T13.2
N$136: R80.1 T14.2
N$137: R88.2 T13.1
N$138: R89.2 T14.1
N$139: LED28.C R90.2
N$140: LED27.C R91.1
N$141: Q22.1 R92.2 R95.2
N$142: Q23.1 R93.2 R94.2
N$143: LED31.A Q22.2 X22.1
N$144: LED32.A Q23.2 X23.1
N$145: C50.1 IC15.27
N$146: JP29.D+ R97.1
N$147: JP29.D- R96.1
N$148: IC15.30 R96.2
N$149: IC15.29 R97.2
N$150: LED29.A R98.2
N$151: C54.1 IC15.2 Q24.2
N$152: C53.1 IC15.1 Q24.1
N$153: IC15.24 R99.2
N$154: LED30.A R100.2
N$155: R92.1 T15.2
N$156: R93.1 T16.2
N$157: R101.2 T15.1
N$158: R102.2 T16.1
N$159: LED32.C R103.2
N$160: LED31.C R104.1
N$161: Q25.1 R105.2 R108.2
N$162: Q26.1 R106.2 R107.2
N$163: LED35.A Q25.2 X25.1
N$164: LED36.A Q26.2 X26.1
N$165: C57.1 IC17.27
N$166: JP33.D+ R110.1
N$167: JP33.D- R109.1
N$168: IC17.30 R109.2
N$169: IC17.29 R110.2
N$170: LED33.A R111.2
N$171: C61.1 IC17.2 Q27.2
N$172: C60.1 IC17.1 Q27.1
N$173: IC17.24 R112.2
N$174: LED34.A R113.2
N$175: R105.1 T17.2
N$176: R106.1 T18.2
N$177: R114.2 T17.1
N$178: R115.2 T18.1
N$179: LED36.C R116.2
N$180: LED35.C R117.1
N$181: Q28.1 R118.2 R121.2
N$182: Q29.1 R119.2 R120.2
N$183: LED39.A Q28.2 X28.1
N$184: LED40.A Q29.2 X29.1
N$185: C64.1 IC19.27
N$186: JP37.D+ R123.1
N$187: JP37.D- R122.1
N$188: IC19.30 R122.2
N$189: IC19.29 R123.2
N$190: LED37.A R124.2
N$191: C68.1 IC19.2 Q30.2
N$192: C67.1 IC19.1 Q30.1
N$193: IC19.24 R125.2
N$194: LED38.A R126.2
N$195: R118.1 T19.2
N$196: R119.1 T20.2
N$197: R127.2 T19.1
N$198: R128.2 T20.1
N$199: LED40.C R129.2
N$200: LED39.C R130.1
N$201: Q31.1 R131.2 R134.2
N$202: Q32.1 R132.2 R133.2
N$203: LED43.A Q31.2 X31.1
N$204: LED44.A Q32.2 X32.1
N$205: C71.1 IC21.27
N$206: JP41.D+ R136.1
N$207: JP41.D- R135.1
N$208: IC21.30 R135.2
N$209: IC21.29 R136.2
N$210: LED41.A R137.2
N$211: C75.1 IC21.2 Q33.2
N$212: C74.1 IC21.1 Q33.1
N$213: IC21.24 R138.2
N$214: LED42.A R139.2
N$215: R131.1 T21.2
N$216: R132.1 T22.2
N$217: R140.2 T21.1
N$218: R141.2 T22.1
N$219: LED44.C R142.2
N$220: LED43.C R143.1
N$221: Q34.1 R144.2 R147.2
N$222: Q35.1 R145.2 R146.2
N$223: LED47.A Q34.2 X34.1
N$224: LED48.A Q35.2 X35.1
N$225: C78.1 IC23.27
N$226: JP45.D+ R149.1
N$227: JP45.D- R148.1
N$228: IC23.30 R148.2
N$229: IC23.29 R149.2
N$230: LED45.A R150.2
N$231: C82.1 IC23.2 Q36.2
N$232: C81.1 IC23.1 Q36.1
N$233: IC23.24 R151.2
N$234: LED46.A R152.2
N$235: R144.1 T23.2
N$236: R145.1 T24.2
N$237: R153.2 T23.1
N$238: R154.2 T24.1
N$239: LED48.C R155.2
N$240: LED47.C R156.1
O1: IC1.21
O2: IC1.20
O3: IC3.20
O4: IC3.21
O5: IC5.20
O6: IC5.21
O7: IC7.20
O8: IC7.21
O9: IC9.20
O10: IC9.21
O11: IC11.20
O12: IC11.21
O13: IC13.20
O14: IC13.21
O15: IC15.20
O16: IC15.21
O17: IC17.20
O18: IC17.21
O19: IC19.20
O20: IC19.21
O21: IC21.20
O22: IC21.21
O23: IC23.20
O24: IC23.21